# EAGLE board id extramini (EAGLE 4.09)
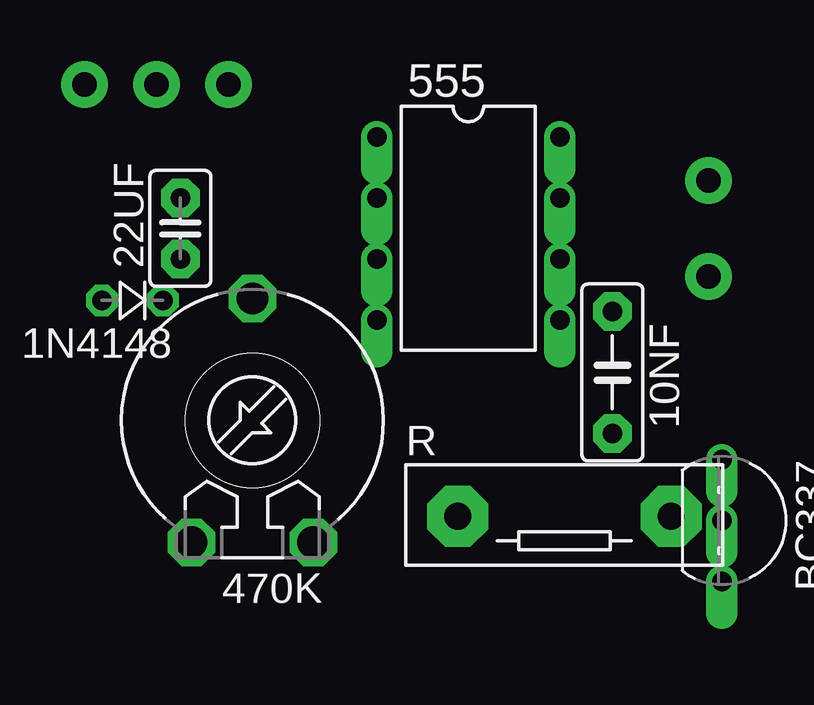
[diagram p0: board, top side]
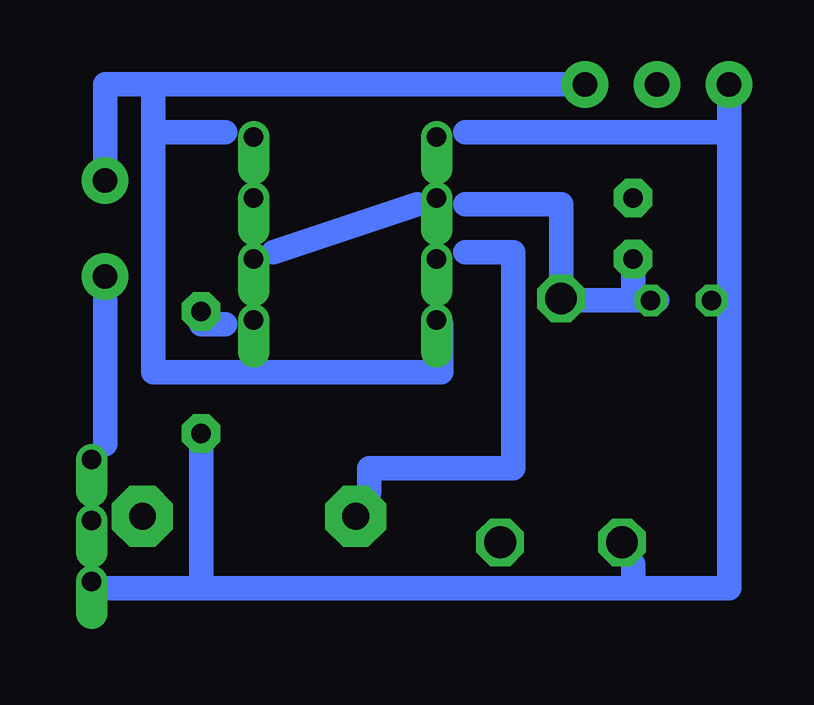
[diagram p1: board, bottom side, seen from below]

No outline drawn. Coordinates in mm, seen from the top.
Copper layers used: Bottom

## Footprints (pad centres in the part's own frame; a part is rotated, then mirrored left to right if it is on the bottom)
D-2.5 = drill 0.813 octagon: A 1.27,0; C -1.27,0
C5B2.5 = drill 0.813 pad 1.6 octagon: 1 -2.54,0; 2 2.54,0
C2.5-2 = drill 0.813 pad 1.6 octagon: 1 -1.27,0; 2 1.27,0
LI10 = drill 1.321 octagon: A -2.54,-5.08; E 2.54,-5.08; S 0,5.08
DIL08 = drill 0.813 offset: 1 -3.81,-3.81; 2 -1.27,-3.81; 3 1.27,-3.81; 4 3.81,-3.81; 5 3.81,3.81; 6 1.27,3.81; 7 -1.27,3.81; 8 -3.81,3.81
TO92-CBE = drill 0.813 offset: B 0,0; C 2.54,0; E -2.54,0
MPC70-2 = drill 1.118 pad 2.54 octagon: 1 -4.445,0; 2 4.445,0

## Placement (x,y rotation side)
1N4148  [D-2.5]  31,23 180 top
10NF  [C5B2.5]  51,20 270 top
22UF  [C2.5-2]  33,26 90 top
470K  [LI10]  36,18 0 top
555  [DIL08]  45,26 270 top
BC337  [TO92-CBE]  55.56,13.83 270 top
R  [MPC70-2]  49,14 0 top

## Library data of the parts
1N4148 = diode
10NF 22UF = capacitor-wima
470K = pot
555 = analog-devices
BC337 = transistor-npn
R = resistor-power

## Tracks (layer width: path | path; a pad name or v marks a point on that pad's centre or on a via)
A  (via drill 1.02 pad 1.93)
  Bottom 1.016: 51,11 55,11 | 33,11 51,11 | 29,30 v29,32 | 29,30 40,30 | 29,30 29,11 33,11 | 51,11 51,16 | 51,11 51,17 | 33,11 33,12
S$1
  Bottom 1.016: 50,22 51,22
S$2
  Bottom 1.016: 42,27 48,25
S$3  (via drill 1.02 pad 1.93)
  Bottom 1.016: 55,23 55,17
  other vias: 55,24
S$4
  Bottom 1.016: 40,25 38,25 38,16 44,16 44,15
S$5  (via drill 1.02 pad 1.93)
  Bottom 1.016: v55,28 55,32 53,32 | 53,32 v35,32 | 53,30 53,32 | 53,30 50,30 | 53,30 53,20 41,20 41,22
S$9
  Bottom 1.016: 33,24 33,23 | 40,27 36,27 36,23 33,23 | 33,23 32,23
S$10  (via drill 1.02 pad 1.93)
  other vias: 32,32

## Text on the board
Pads: _ | 9V | K1 | + | K2 | Izzó